# EAGLE board atmega_fusebit_doctor_V2hOld (EAGLE 6.4)
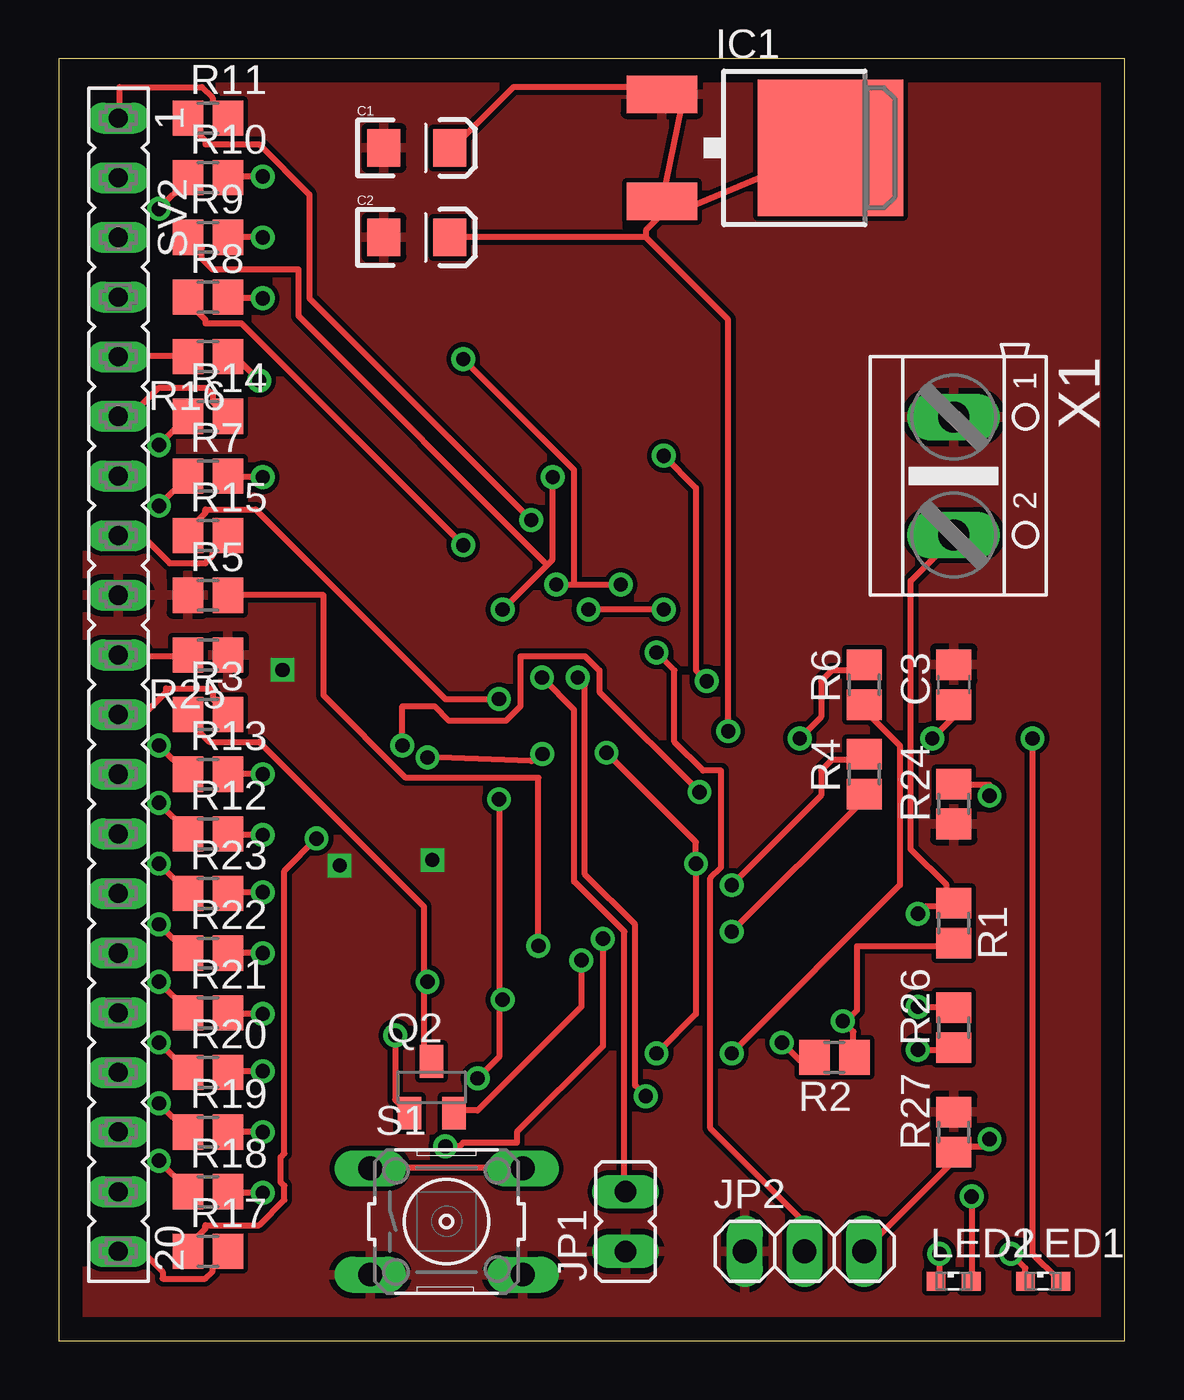
[diagram p0: board, top side]
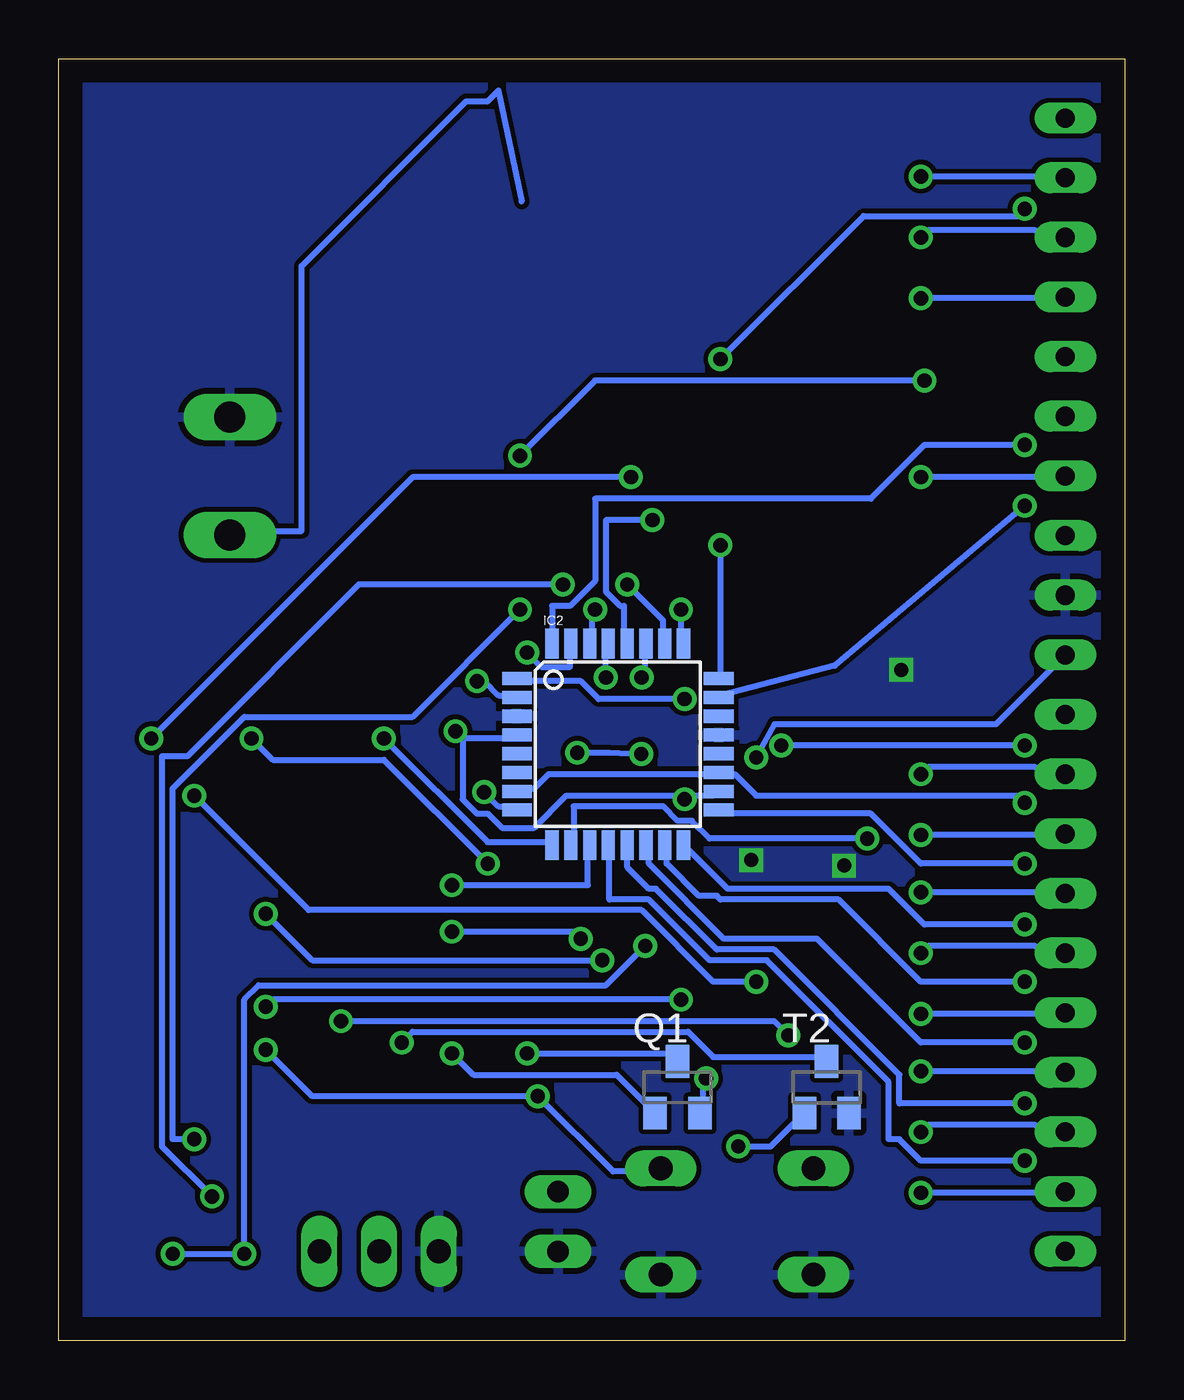
[diagram p1: board, bottom side, seen from below]

Size 45.39 x 54.6 mm. Coordinates in mm from the lower left corner, seen from the top.
Outline: 0,0 45.39,0 45.39,54.6 0,54.6 0,0
Copper layers (1*16): Top 0.035mm / dielectric 1.5mm / Bottom 0.035mm
Design rules "default": minimum track width 10mil, minimum drill 24mil, track to track 8mil, track to pad 8mil, pad to pad 8mil, via to via 8mil, smd to smd 8mil, copper to edge 40mil, drill to drill 8mil, minimum pad ring 10mil, minimum via ring 8mil, stop-mask expansion 4mil, vias tented up to drill 0mil, thermal gap 10mil

## Footprints (pad centres in the part's own frame; a part is rotated, then mirrored left to right if it is on the bottom)
EIA3216 = smd 1.4 x 1.6: A 1.4,0; C -1.4,0
C0805 = smd 1.3 x 1.5: 1 -0.85,0; 2 0.85,0
V-REG_DPACK = smd 1.6 x 3: 1 -2.28,-4.8; 3 2.28,-4.8 | smd 5.8 x 6.2: 4 0,2.38
TQFP32-08 = smd 1.27 x 0.559: 1 -4.293,2.8; 2 -4.293,2; 3 -4.293,1.2; 4 -4.293,0.4; 5 -4.293,-0.4; 6 -4.293,-1.2; 7 -4.293,-2; 8 -4.293,-2.8; 17 4.293,-2.8; 18 4.293,-2; 19 4.293,-1.2; 20 4.293,-0.4; 21 4.293,0.4; 22 4.293,1.2; 23 4.293,2; 24 4.293,2.8 | smd 0.559 x 1.27: 9 -2.8,-4.293; 10 -2,-4.293; 11 -1.2,-4.293; 12 -0.4,-4.293; 13 0.4,-4.293; 14 1.2,-4.293; 15 2,-4.293; 16 2.8,-4.293; 25 2.8,4.293; 26 2,4.293; 27 1.2,4.293; 28 0.4,4.293; 29 -0.4,4.293; 30 -1.2,4.293; 31 -2,4.293; 32 -2.8,4.293
JP1 = drill 0.914 long: 1 0,-1.27; 2 0,1.27
1X03 = drill 1.016 long: 1 -2.54,0; 2 0,0; 3 2.54,0
SML0603 = smd 0.8 x 0.8: A 0.75,0; C -0.75,0
SOT23-BEC = smd 1 x 1.4: B -0.95,-1.1; C 0,1.1; E 0.95,-1.1
R0805 = smd 1.3 x 1.5: 1 -0.85,0; 2 0.85,0
B3F-10XX = drill 1.016 long: 1 -3.251,2.261; 2 3.251,2.261; 3 -3.251,-2.261; 4 3.251,-2.261
FE20 = drill 0.813 long: 1 -24.13,0; 2 -21.59,0; 3 -19.05,0; 4 -16.51,0; 5 -13.97,0; 6 -11.43,0; 7 -8.89,0; 8 -6.35,0; 9 -3.81,0; 10 -1.27,0; 11 1.27,0; 12 3.81,0; 13 6.35,0; 14 8.89,0; 15 11.43,0; 16 13.97,0; 17 16.51,0; 18 19.05,0; 19 21.59,0; 20 24.13,0
SOT23 = smd 1 x 1.4: 1 -0.95,-1.1; 2 0.95,-1.1; 3 0,1.1
AK500/2 = drill 1.321 long: 1 -2.515,0; 2 2.515,0

## Placement (x,y rotation side)
C1  100uF  [EIA3216]  15.24,50.8 0 top
C2  10uF  [EIA3216]  15.24,46.99 0 top
C3  10nF  [C0805]  38.1,27.94 90 top
IC1  7805  [V-REG_DPACK]  30.48,50.8 270 top
IC2  ATMEGA8-DOC  [TQFP32-08]  21.59,25.4 0 bottom
JP1  ERASE  [JP1]  24.13,5.08 0 top
JP2  RS232  [1X03]  31.75,3.81 0 top
LED1  red  [SML0603]  41.91,2.54 0 top
LED2  green  [SML0603]  38.1,2.54 0 top
Q1  BC857ALT1SMD  [SOT23-BEC]  19.05,10.79 0 bottom
Q2  BC857ALT1SMD  [SOT23-BEC]  15.88,10.79 0 top
R1  10K  [R0805]  38.1,17.78 270 top
R2  1K  [R0805]  33.02,12.06 180 top
R3  100  [R0805]  6.35,26.67 0 top
R4  4K7  [R0805]  34.29,24.13 90 top
R5  330  [R0805]  6.35,31.75 0 top
R6  4K7  [R0805]  34.29,27.94 90 top
R7  1K  [R0805]  6.35,36.83 0 top
R8  1K  [R0805]  6.35,44.45 0 top
R9  1K  [R0805]  6.35,46.99 0 top
R10  1K  [R0805]  6.35,49.53 0 top
R11  1K  [R0805]  6.35,52.07 0 top
R12  1K  [R0805]  6.35,21.59 0 top
R13  1K  [R0805]  6.35,24.13 0 top
R14  1K  [R0805]  6.35,39.37 0 top
R15  1K  [R0805]  6.35,34.29 0 top
R16  1K  [R0805]  6.35,41.91 180 top
R17  1K  [R0805]  6.35,3.81 0 top
R18  1K  [R0805]  6.35,6.35 0 top
R19  1K  [R0805]  6.35,8.89 0 top
R20  1K  [R0805]  6.35,11.43 0 top
R21  1K  [R0805]  6.35,13.97 0 top
R22  1K  [R0805]  6.35,16.51 0 top
R23  1K  [R0805]  6.35,19.05 0 top
R24  1K  [R0805]  38.1,22.86 90 top
R25  100  [R0805]  6.35,29.21 180 top
R26  1K  [R0805]  38.1,13.33 90 top
R27  10K  [R0805]  38.1,8.89 90 top
S1  START  [B3F-10XX]  16.51,5.08 0 top
SV2  [FE20]  2.54,27.94 270 top
T2  BC847  [SOT23]  12.7,10.79 0 bottom
X1  [AK500/2]  38.1,36.83 270 top

## Library data of the parts
C1 C2 IC1 IC2 = SparkFun
C3 R1-R27 = resistor
JP1 = jumper
JP2 = pinhead
LED1 LED2 = led
Q1 Q2 = transistor-pnp
S1 = switch-omron
SV2 = con-lsta
T2 = transistor
X1 = con-ptr500

## Nets
+5V: C3.1 Q1.C R25.2 SV2.10
+12V: R3.2 SV2.11
BS1: R8.2 SV2.4
BS2: R17.2 SV2.20
DATA0: R18.2 SV2.19
DATA1: R19.2 SV2.18
DATA2: R20.2 SV2.17
DATA3: R21.2 SV2.16
DATA4: R22.2 SV2.15
DATA5: R23.2 SV2.14
DATA6: R12.2 SV2.13
DATA7: R13.2 SV2.12
GND: C1.C C2.C C3.2 IC1.1 IC2.3 IC2.21 JP1.1 JP2.1 R5.1 R24.1 R25.1 R27.2 S1.3 S1.4 SV2.9 T2.2 X1.1
N$1: Q1.B R6.1
N$2: IC2.12 R18.1
N$3: IC2.31 JP2.2
N$4: IC2.28 R11.1
N$5: IC2.2 R16.1
N$6: IC2.32 R14.1
N$7: IC2.30 JP2.3 R27.1
N$8: R2.2 T2.3
N$9: IC2.7 IC2.19 R12.1
N$10: IC2.8 R13.1
N$11: IC2.11 R4.2
N$12: IC2.9 R6.2
N$14: IC2.13 R19.1
N$16: IC2.14 R20.1
N$19: IC2.1 R15.1
N$21: IC2.23 R7.1
N$22: Q2.C R3.1 R24.2
N$24: IC2.15 R21.1
N$25: IC2.16 R22.1
N$26: IC2.17 R23.1
N$27: IC2.10 R17.1
N$29: R4.1 T2.1
N$31: IC2.27 JP1.2
N$32: LED1.C LED2.C R5.2
N$34: Q2.B R1.2 R2.1
N$42: IC2.24 R8.1
N$43: IC2.29 R26.1 S1.1 S1.2
N$47: IC2.26 LED2.A R10.1
N$48: IC2.25 LED1.A R9.1
OE: R14.2 SV2.6
PAG: R11.2 SV2.1
RDY: R7.2 SV2.7
V+: C1.A IC1.3 Q2.E R1.1 X1.2
VCC: C2.A IC1.4 IC2.4 IC2.18 Q1.E R26.2
WR: R16.2 SV2.5
XA0: R9.2 SV2.3
XA1: R10.2 SV2.2
XTAL1: R15.2 SV2.8

## Tracks (layer width: path | path; a pad name or v marks a point on that pad's centre or on a via)
+5V  (via drill 0.61)
  Top 0.254: R25.2 5.49,29.16 2.59,29.16 SV2.10 | v25.45,12.24 27.13,13.92 v27.13,20.32 27.13,21.23 v23.32,25.04 | v37.19,25.65 38.1,26.57 C3.1 | v15.7,24.84 16.15,24.84 20.12,24.69 v20.59,24.99
  Bottom 0.254: v25.45,12.24 19.36,12.24 19.05,11.94 Q1.C | v27.13,20.32 31.55,24.74 36.27,24.74 v37.19,25.65 | SV2.10 5.49,26.26 14.91,26.26 v15.7,24.84 | v20.59,24.99 21.95,25.04 v23.32,25.04
+12V
  Top 0.254: R3.2 7.16,26.72 6.55,27.33 6.55,27.63 6.4,27.79 4.57,27.79 4.57,27.63 3.66,26.72 2.59,26.72 SV2.11
BS1  (via drill 0.61)
  Top 0.254: v8.69,44.4 7.32,44.4 R8.2
  Bottom 0.254: v8.69,44.4 2.59,44.4 SV2.4
BS2
  Top 0.254: R17.2 7.16,3.71 6.55,3.1 6.55,2.95 6.25,2.64 4.42,2.64 4.42,2.95 3.66,3.71 2.59,3.71 SV2.20
DATA0  (via drill 0.61)
  Top 0.254: v8.69,6.3 7.32,6.3 R18.2
  Bottom 0.254: v8.69,6.3 2.59,6.3 SV2.19
DATA1  (via drill 0.61)
  Top 0.254: v8.69,8.89 R19.2
  Bottom 0.254: v8.69,8.89 8.38,9.2 3.81,9.2 3.5,8.89 SV2.18
DATA2  (via drill 0.61)
  Top 0.254: v8.69,11.48 7.32,11.48 R20.2
  Bottom 0.254: v8.69,11.48 2.59,11.48 SV2.17
DATA3  (via drill 0.61)
  Top 0.254: v8.69,13.92 7.32,13.92 R21.2
  Bottom 0.254: v8.69,13.92 2.59,13.92 SV2.16
DATA4  (via drill 0.61)
  Top 0.254: v8.69,16.51 R22.2
  Bottom 0.254: v8.69,16.51 8.38,16.82 3.81,16.82 3.5,16.51 SV2.15
DATA5  (via drill 0.61)
  Top 0.254: v8.69,19.1 7.32,19.1 R23.2
  Bottom 0.254: v8.69,19.1 2.59,19.1 SV2.14
DATA6  (via drill 0.61)
  Top 0.254: v8.69,21.54 7.32,21.54 R12.2
  Bottom 0.254: v8.69,21.54 2.59,21.54 SV2.13
DATA7  (via drill 0.61)
  Top 0.254: v8.69,24.13 R13.2
  Bottom 0.254: v8.69,24.13 8.38,24.43 3.81,24.43 3.5,24.13 SV2.12
GND  (via drill 0.6)
  other vias: 9.53,28.57 11.96,20.24 15.91,20.47
  pour Bottom: 0,0 45.72,0 45.72,54.61 0,54.61
  pour Top: 0,54.61 0,0 45.72,0 45.72,54.61
N$1  (via drill 0.61)
  Top 0.254: v28.65,12.24 35.81,19.41 35.81,25.35 34.29,26.87 R6.1
  Bottom 0.254: v28.65,12.24 27.74,11.33 21.64,11.33 20.12,9.8 Q1.B
N$2  (via drill 0.61)
  Top 0.254: v4.27,7.67 5.49,6.45 R18.1
  Bottom 0.254: v4.27,7.67 8.69,7.67 9.6,8.59 10.06,8.59 10.06,11.02 15.24,16.21 17.68,16.21 20.27,18.8 21.95,18.8 21.95,21.08 IC2.12
N$3  (via drill 0.61)
  Top 0.254: v25.45,29.31 26.21,28.55 26.21,25.5 27.43,24.28 28.19,24.28 28.19,20.17 27.74,19.71 27.74,9.04 31.7,5.08 31.7,3.86 JP2.2
  Bottom 0.254: v25.45,29.31 24.84,28.7 23.62,28.7 23.62,29.62 IC2.31
N$4  (via drill 0.61)
  Top 0.254: v20.12,34.95 10.67,44.4 10.67,48.82 8.53,50.95 6.25,50.95 6.25,51.11 5.64,51.71 5.64,52.02 R11.1
  Bottom 0.254: v20.12,34.95 22.1,34.95 22.1,31.9 21.49,31.29 21.34,31.29 21.34,29.77 IC2.28
N$5  (via drill 0.61)
  Top 0.254: v27.58,28.09 27.13,28.55 27.13,36.32 v25.76,37.69 | v8.53,40.89 7.62,41.81 7.32,41.81 R16.1
  Bottom 0.254: v27.58,28.09 27.28,28.09 26.67,27.48 25.91,27.48 IC2.2 | v25.76,37.69 22.55,40.89 v8.53,40.89
N$6  (via drill 0.61)
  Top 0.254: v4.27,38.15 5.49,39.37 R14.1
  Bottom 0.254: v4.27,38.15 8.53,38.15 10.82,35.87 22.55,35.87 22.55,32.36 23.62,31.29 24.38,31.29 24.38,29.77 IC2.32
N$7  (via drill 0.61)
  Top 0.254: v25.76,31.14 v22.55,31.14 | v39.62,8.59 39.32,8.28 38.1,8.28 R27.1 38.1,7.67 34.29,3.86 JP2.3
  Bottom 0.254: v22.55,31.14 22.71,31.14 22.71,29.77 IC2.30 | v25.76,31.14 30.33,26.57 37.49,26.57 40.54,23.52 40.54,8.59 v39.62,8.59
N$8  (via drill 0.61)
  Top 0.254: v30.79,12.7 31.55,11.94 32.16,11.94 R2.2
  Bottom 0.254: v30.79,12.7 30.33,13.16 18.59,13.16 17.53,12.09 12.95,12.09 12.8,11.94 T2.3
N$9  (via drill 0.61)
  Top 0.254: v4.27,22.91 5.49,21.69 R12.1
  Bottom 0.254: IC2.7 25.76,23.52 25.15,23.52 24.54,24.13 17.37,24.13 IC2.19 17.22,24.13 16.61,24.13 15.7,23.22 4.57,23.22 v4.27,22.91
N$10  (via drill 0.61)
  Top 0.254: v27.28,23.37 23.01,27.63 23.01,28.55 22.4,29.16 19.66,29.16 19.66,27.03 19.05,26.42 16.61,26.42 16,27.03 14.63,27.03 v14.63,25.35 | v4.27,25.35 5.49,24.13 R13.1
  Bottom 0.254: v27.28,23.37 26.67,22.76 26.06,22.76 25.91,22.61 IC2.8 | v4.27,25.35 v14.63,25.35
N$11  (via drill 0.61)
  Top 0.254: v28.65,19.41 32.46,23.22 32.46,24.28 32.92,24.74 34.29,24.74 R4.2
  Bottom 0.254: v28.65,19.41 22.86,19.41 22.86,21.08 IC2.11
N$12  (via drill 0.61)
  Top 0.254: v31.55,25.65 32.46,26.57 32.46,28.09 32.92,28.55 34.29,28.55 R6.2
  Bottom 0.254: v31.55,25.65 27.13,21.23 24.54,21.23 IC2.9
N$14  (via drill 0.61)
  Top 0.254: v4.27,10.11 5.49,8.89 R19.1
  Bottom 0.254: v4.27,10.11 9.6,10.11 9.6,11.33 14.94,16.66 17.37,16.66 19.96,19.25 20.27,19.25 21.18,20.17 21.18,21.08 IC2.13
N$16  (via drill 0.61)
  Top 0.254: v4.27,12.7 5.49,11.48 R20.1
  Bottom 0.254: v4.27,12.7 8.69,12.7 13.11,17.12 17.07,17.12 20.27,20.32 20.27,21.08 IC2.14
N$19  (via drill 0.61)
  Top 0.254: v18.75,27.33 16.46,27.33 8.38,35.41 6.25,35.41 6.25,35.26 5.64,34.65 5.64,34.34 R15.1
  Bottom 0.254: v18.75,27.33 22.4,27.33 23.16,28.09 25.76,28.09 IC2.1
N$21  (via drill 0.61)
  Top 0.254: v4.27,35.56 5.49,36.78 R7.1
  Bottom 0.254: v4.27,35.56 12.34,28.75 17.22,27.48 IC2.23
N$22  (via drill 0.61)
  Top 0.254: 15.54,15.29 15.54,18.49 8.53,25.5 6.4,25.5 5.64,26.26 5.64,26.57 R3.1 | 15.54,15.29 15.54,12.24 15.85,11.94 Q2.C | v39.62,23.22 39.62,23.67 38.1,23.67 R24.2 | 15.54,15.29 v15.7,15.29
  Bottom 0.254: v39.62,23.22 34.75,18.34 20.57,18.34 17.53,15.29 v15.7,15.29
N$24  (via drill 0.61)
  Top 0.254: v4.27,15.29 5.49,14.07 R21.1
  Bottom 0.254: v4.27,15.29 8.69,15.29 12.19,18.8 17.22,18.8 17.37,18.95 18.14,18.95 19.51,20.32 19.51,21.08 IC2.15
N$25  (via drill 0.61)
  Top 0.254: v4.27,17.73 5.49,16.51 R22.1
  Bottom 0.254: v4.27,17.73 8.53,17.73 10.06,19.25 16.92,19.25 18.75,21.08 IC2.16
N$26  (via drill 0.61)
  Top 0.254: v4.27,20.32 5.49,19.1 R23.1
  Bottom 0.254: v4.27,20.32 8.69,20.32 10.82,22.45 17.22,22.45 IC2.17
N$27  (via drill 0.61)
  Top 0.254: v10.97,21.39 9.6,20.02 9.6,7.98 9.45,7.82 9.45,6.76 9.6,6.6 9.6,5.99 8.53,4.93 6.25,4.93 6.25,4.78 5.64,4.17 5.64,3.86 R17.1
  Bottom 0.254: v10.97,21.39 17.68,21.39 18.44,22.15 19.05,22.15 19.66,22.76 23.47,22.76 23.47,21.23 IC2.10
N$29  (via drill 0.61)
  Top 0.254: v16.46,8.28 17.07,8.28 17.22,8.43 19.51,8.43 19.51,8.89 23.16,12.55 v23.16,17.12 | v28.65,17.42 34.29,23.06 R4.1
  Bottom 0.254: v16.46,8.28 15.09,8.28 13.72,9.65 T2.1 | v23.16,17.12 23.47,17.42 v28.65,17.42
N$31  (via drill 0.61)
  Top 0.254: v20.57,28.25 21.95,26.87 21.95,19.56 24.08,17.42 24.08,6.45 JP1.2
  Bottom 0.254: v20.57,28.25 20.42,28.25 20.42,29.62 IC2.27
N$32  (via drill 0.61)
  Top 0.254: v37.49,3.71 37.49,2.64 LED2.C | v40.54,3.71 41.15,3.1 41.15,2.64 LED1.C | R5.2 11.28,31.75 11.28,27.48 14.78,23.98 20.42,23.98 v20.42,16.82
  Bottom 0.254: v40.54,3.71 v37.49,3.71 37.49,14.53 36.88,15.14 22.1,15.14 v20.42,16.82
N$34  (via drill 0.61)
  Top 0.254: v14.33,13 14.33,10.26 14.78,9.8 Q2.B | R2.1 33.83,12.09 33.83,13.16 v33.38,13.61 33.53,13.61 33.98,14.07 33.98,16.82 38.1,16.82 R1.2
  Bottom 0.254: v14.33,13 14.94,13.61 v33.38,13.61
N$42  (via drill 0.61)
  Top 0.254: v17.22,33.88 7.77,43.33 6.25,43.33 6.25,43.49 5.64,44.09 5.64,44.4 R8.1
  Bottom 0.254: v17.22,33.88 17.22,28.25 IC2.24
N$43  (via drill 0.61)
  Top 0.254: v22.1,28.25 22.4,27.94 22.4,19.86 24.54,17.73 24.54,10.87 v24.99,10.41 | v36.58,12.39 38.1,12.39 R26.1 | S1.1 12.04,7.37 18.44,7.37 S1.2
  Bottom 0.254: v22.1,28.25 22.1,29.62 IC2.29 | S1.2 18.59,7.21 21.79,7.21 v24.99,10.41 34.59,10.41 v36.58,12.39
N$47  (via drill 0.61)
  Top 0.254: v38.86,6.15 38.86,2.64 LED2.A | v21.18,32.21 21.95,32.21 | 21.95,32.21 v23.93,32.21 | v4.27,48.21 5.49,49.43 R10.1 | v17.22,41.81 21.95,37.08 21.95,32.21
  Bottom 0.254: v38.86,6.15 41,8.28 41,24.89 39.93,24.89 32.61,32.21 v23.93,32.21 | v21.18,32.21 19.66,30.68 19.66,29.77 IC2.26 | v4.27,48.21 4.57,47.9 11.12,47.9 v17.22,41.81
N$48  (via drill 0.61)
  Top 0.254: v41.45,25.65 41.45,3.71 42.52,2.64 LED1.A | v21.03,36.78 21.03,33.27 20.8,33.05 | v18.9,31.14 20.8,33.05 | 20.8,33.05 10.21,43.64 10.21,45.62 6.55,45.62 6.1,46.08 6.1,46.53 5.64,46.99 R9.1
  Bottom 0.254: v41.45,25.65 30.33,36.78 v21.03,36.78 | v18.9,31.14 18.9,29.77 IC2.25
OE
  Top 0.254: SV2.6 3.05,39.37 4.27,40.59 6.25,40.59 6.55,40.28 6.55,39.98 7.16,39.37 R14.2
PAG
  Top 0.254: R11.2 7.16,52.17 6.55,52.78 6.55,52.93 6.1,53.39 2.59,53.39 2.59,52.17 SV2.1
RDY  (via drill 0.61)
  Top 0.254: v8.69,36.78 7.32,36.78 R7.2
  Bottom 0.254: v8.69,36.78 2.59,36.78 SV2.7
V+  (via drill 0.61)
  Top 0.254: C1.A 16.76,50.8 19.36,53.39 26.67,53.39 IC1.3 | v22.25,16.21 22.25,14.22 17.83,9.8 16.92,9.8 Q2.E | v36.58,18.19 36.88,18.49 37.8,18.49 | 37.8,18.49 38.1,18.49 R1.1 37.8,18.49 | 37.8,18.49 37.8,19.41 36.27,20.93 36.27,32.36 38.1,34.19 X1.2
  Bottom 0.254: v22.25,16.21 34.59,16.21 v36.58,18.19 | IC1.3 26.67,53.24 27.13,52.78 28.04,52.78 35.05,45.77 35.05,34.49 37.95,34.49 38.1,34.34 X1.2
VCC  (via drill 0.61)
  Top 0.254: 24.99,46.99 C2.A | 24.99,46.99 24.99,47.3 25.91,48.21 26.67,48.21 IC1.4 | v17.83,11.18 18.75,12.09 18.75,14.53 | v18.75,23.06 18.75,14.53 | v36.58,14.22 38.1,14.22 R26.2 | 18.75,14.53 v18.9,14.53 | 24.99,46.99 28.5,43.49 v28.5,25.96
  Bottom 0.254: 18.75,23.22 23.77,23.22 25.15,21.84 26.52,21.84 27.13,22.45 27.58,22.45 28.19,23.06 28.19,25.65 | 18.75,23.22 17.53,23.22 17.37,23.37 IC2.18 | 28.19,25.65 25.91,25.65 IC2.4 | v17.83,11.18 17.98,11.18 17.98,9.8 Q1.E | 18.75,23.22 v18.75,23.06 | v36.58,14.22 36.27,14.53 v18.9,14.53 | 28.19,25.65 v28.5,25.96
WR
  Top 0.254: R16.2 5.49,41.96 2.59,41.96 SV2.5
XA0  (via drill 0.61)
  Top 0.254: v8.69,46.99 R9.2
  Bottom 0.254: v8.69,46.99 8.38,47.3 3.81,47.3 3.5,46.99 SV2.3
XA1  (via drill 0.61)
  Top 0.254: v8.69,49.58 7.32,49.58 R10.2
  Bottom 0.254: v8.69,49.58 2.59,49.58 SV2.2
XTAL1
  Top 0.254: R15.2 7.16,34.19 6.55,33.58 6.55,33.43 6.25,33.12 4.72,33.12 3.66,34.19 2.59,34.19 SV2.8